# Altium PCB PCB1.PcbDoc
Units mm, origin at the board's own origin, x right, y up, seen from the top; angles counter-clockwise.
Board outline 96.5 x 55.5 mm, 2 copper layers (Top Layer, Bottom Layer), stack 1.671 mm thick; 20 components, 13 nets, 49 pads, 0 vias.
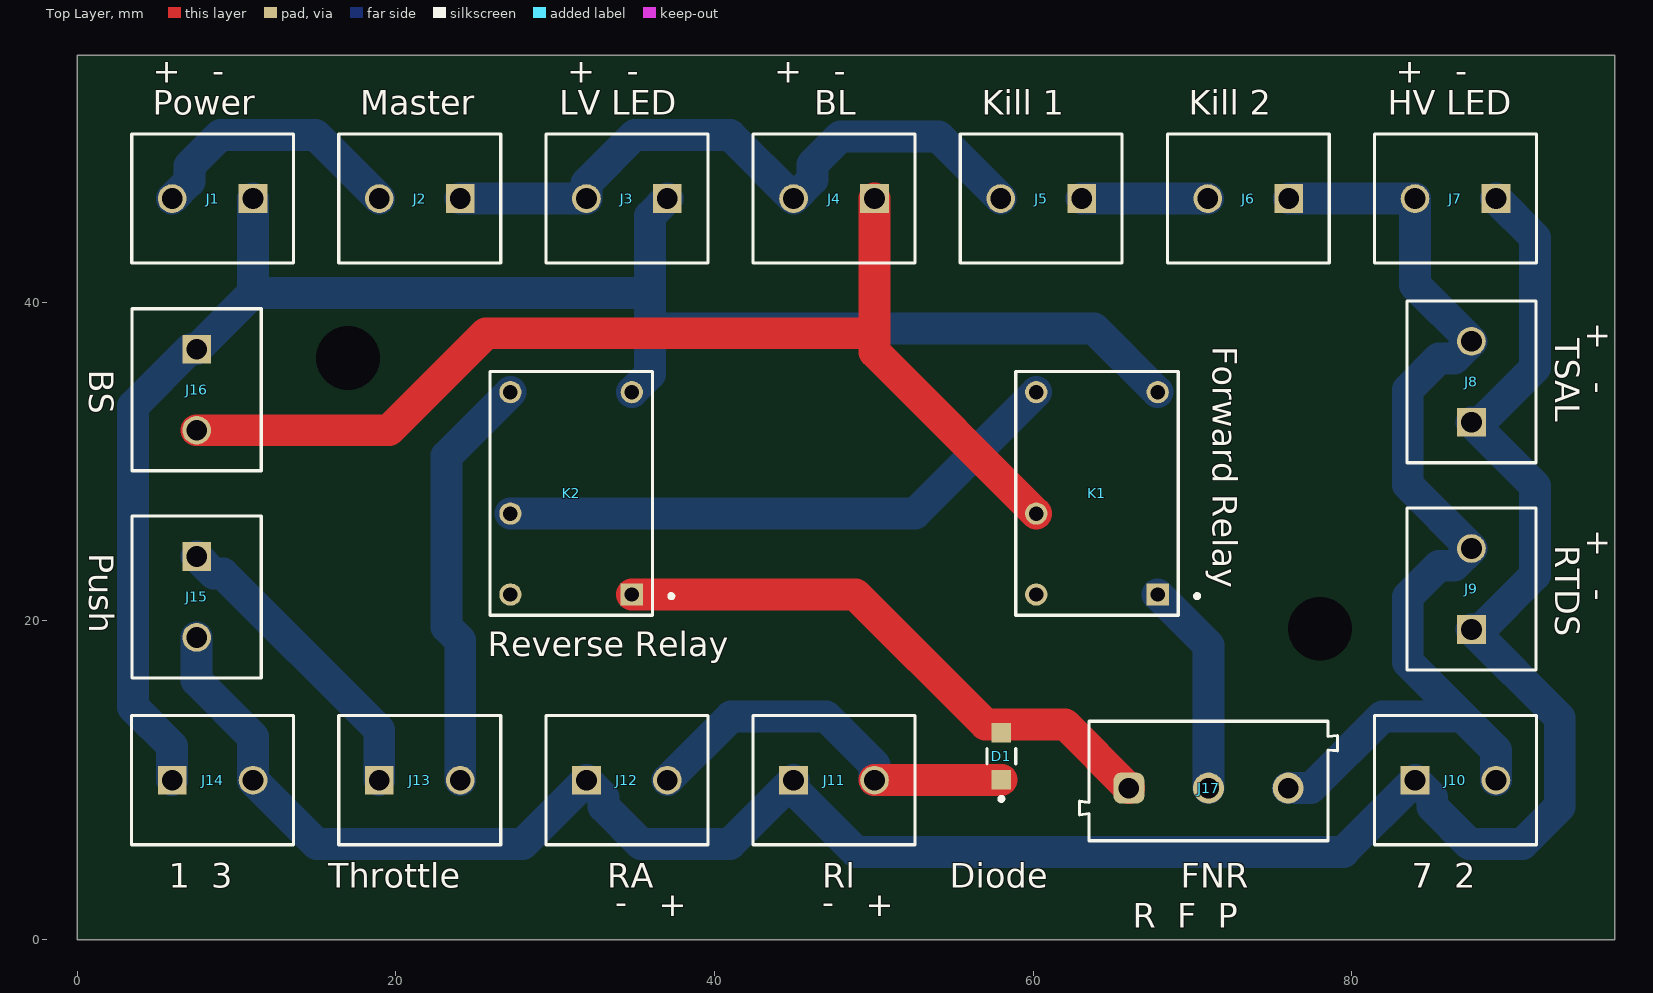
[diagram p0: Top Layer view]
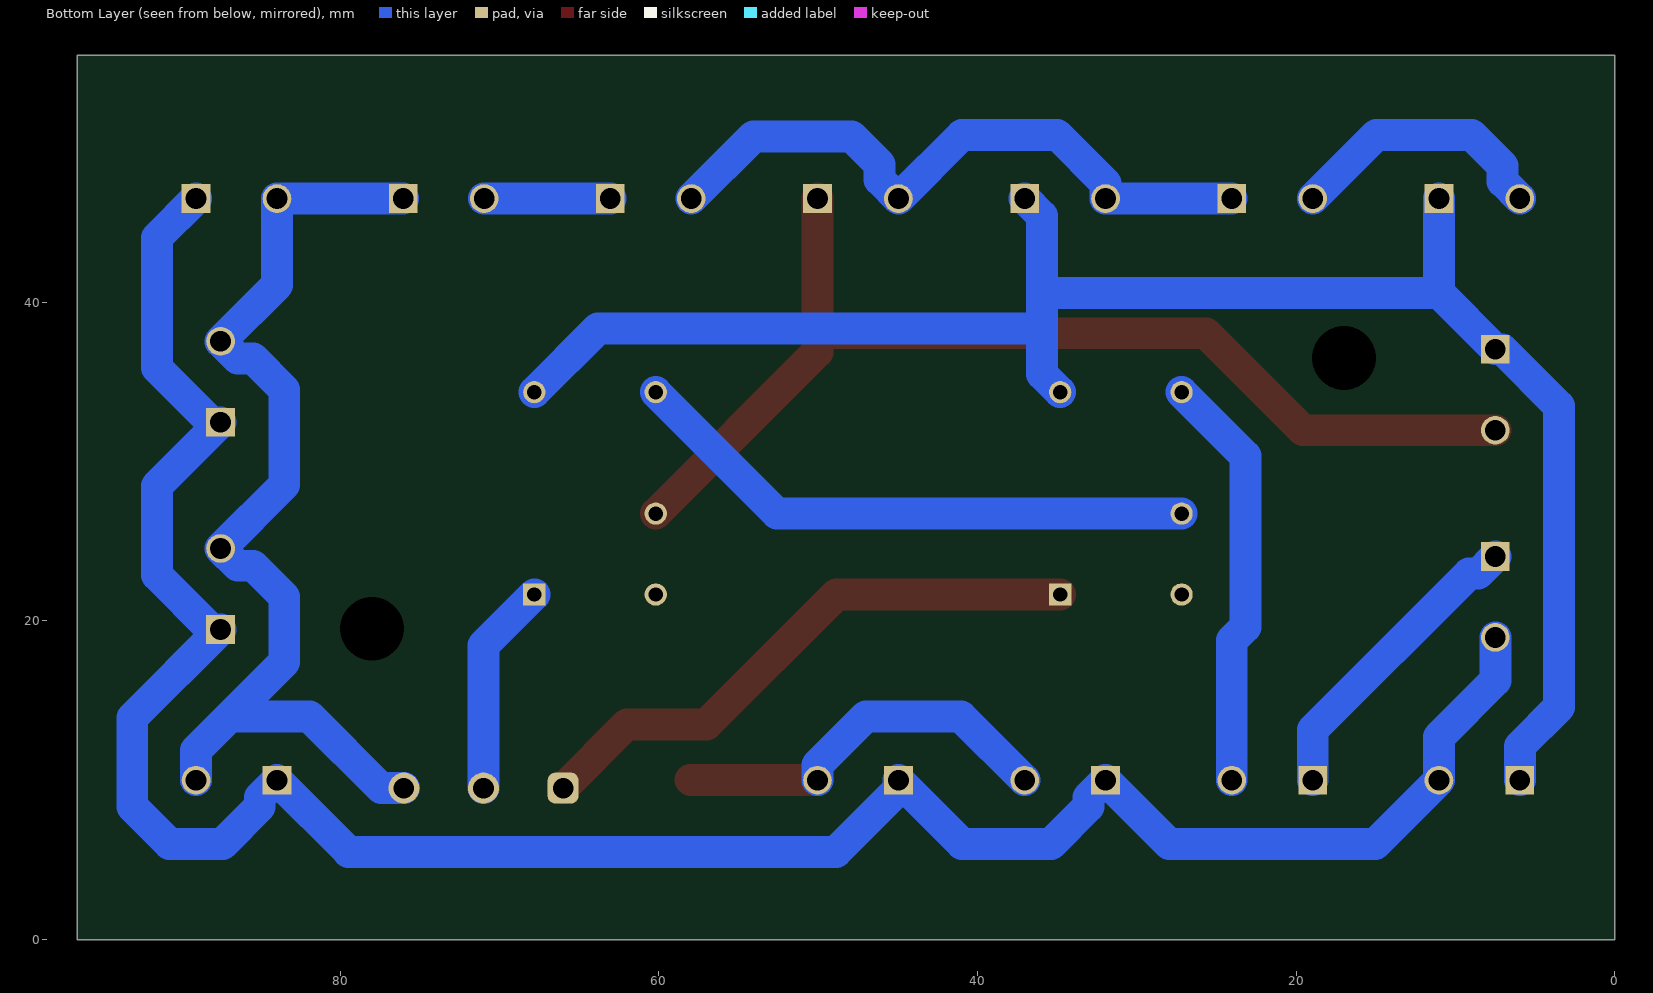
[diagram p1: Bottom Layer view, seen from below]
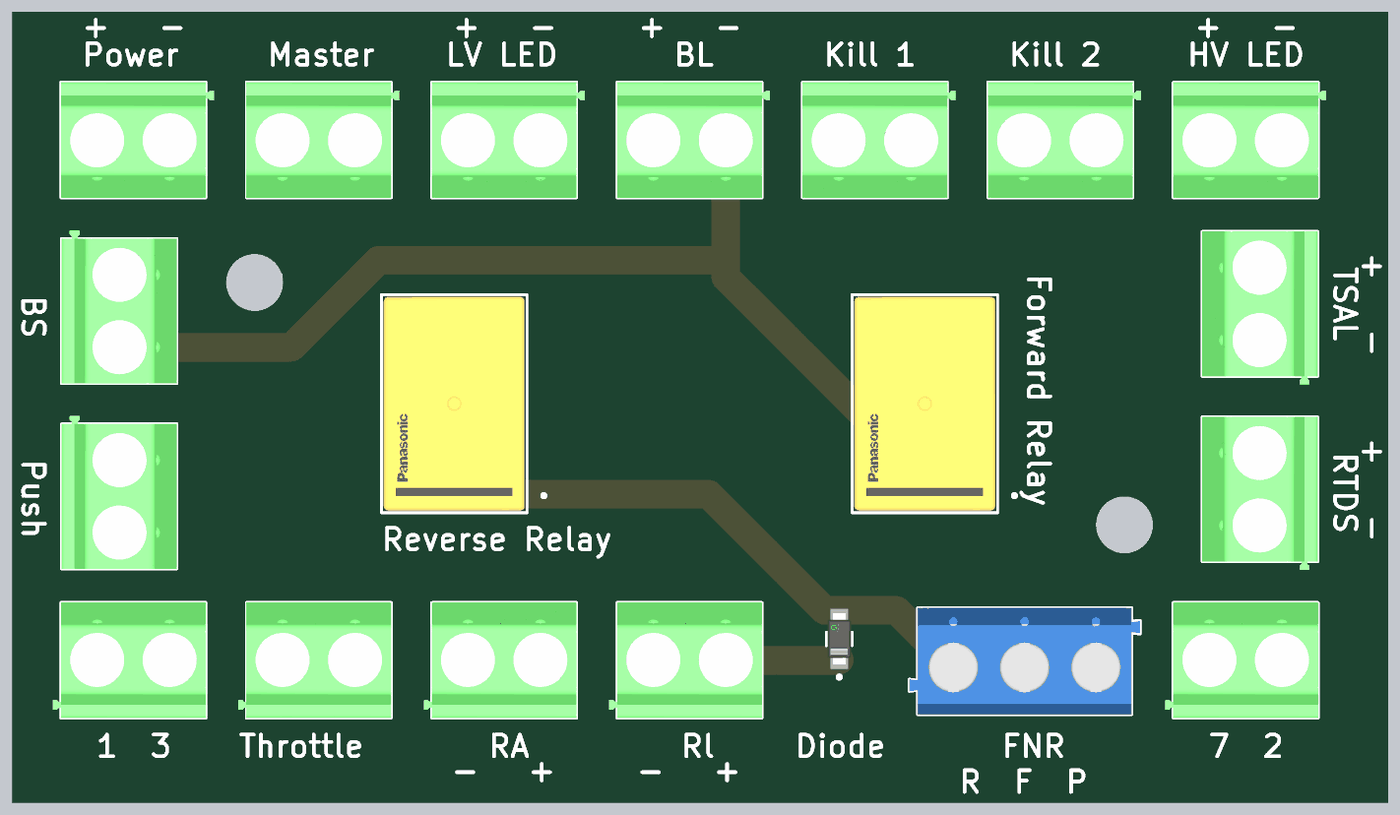
[diagram p2: 3D render of the assembled board from above, using the file's embedded part models]

## Layer stack, top to bottom
Top Solder: solder mask 0.0102, Solder Resist, Dk 3.5
Top Layer: signal copper 0.0356
Dielectric 1: dielectric 1.6, FR-4, Dk 4.8
Bottom Layer: signal copper 0.0356
Bottom Solder: solder mask 0.0102, Solder Resist, Dk 3.5

## Board outline
0,0 96.5,0 96.5,55.5 0,55.5

## Design rules (kind name [scope] priority, off if disabled: settings)
Clearance [All] p1: gap=1 ignorepadtopadclearanceinfootprint=TRUE
HoleSize [All] p1: absolutevalues=TRUE maxlimit=10 minlimit=0.025 maxpercent=80.000 minpercent=20.000
PolygonConnect [All] p1: connectstyle=Relief reliefconductorwidth=0.254 reliefentries=4 polygonreliefangle="90 Angle" airgapwidth=0.254
RoutingVias [All] p1: holewidth=1 width=2 viastyle="Through Hole" minholewidth=1 minwidth=2 maxholewidth=1 maxwidth=2
SolderMaskExpansion [All] p1: expansion=0.102 istentingtop=FALSE
SupplyNets "Schematic Supply Nets_3" [InNet('+12')] p1: voltage=0.000
SupplyNets "Schematic Supply Nets_2" [InNet('GND')] p2: voltage=0.000
Width [All] p1: maxlimit=3 minlimit=1 preferedwidth=2
29 further rules are at their usual default settings.

## Components (designator, comment, footprint, x,y, rotation, side; value= is the part's Value field where it differs from the comment)
D1 "MBR230LSFT1G" FP-498-MFG 58,11.5 r90 top
J1 "1729128" PHOE-1729128-2_V 8.5,46.5 r180 top
J2 "1729128" PHOE-1729128-2_V 21.5,46.5 r180 top
J3 "1729128" PHOE-1729128-2_V 34.5,46.5 r180 top
J4 "1729128" PHOE-1729128-2_V 47.5,46.5 r180 top
J5 "1729128" PHOE-1729128-2_V 60.5,46.5 r180 top
J6 "1729128" PHOE-1729128-2_V 73.5,46.5 r180 top
J7 "1729128" PHOE-1729128-2_V 86.5,46.5 r180 top
J8 "1729128" PHOE-1729128-2_V 87.5,35 r90 top
J9 "1729128" PHOE-1729128-2_V 87.5,22 r90 top
J10 "1729128" PHOE-1729128-2_V 86.5,10 r0 top
J11 "1729128" PHOE-1729128-2_V 47.5,10 r0 top
J12 "1729128" PHOE-1729128-2_V 34.5,10 r0 top
J13 "1729128" PHOE-1729128-2_V 21.5,10 r0 top
J14 "1729128" PHOE-1729128-2_V 8.5,10 r0 top
J15 "1729128" PHOE-1729128-2_V 7.5,21.5 r270 top
J16 "1729128" PHOE-1729128-2_V 7.5,34.5 r270 top
J17 "691102710003" 691102710003 71,9.95 r0 top
K1 "DS1E-S-DC12V" FP-DS1E-S-DC12V-MFG 64,28 r90 top
K2 "DS1E-S-DC12V" FP-DS1E-S-DC12V-MFG 31,28 r90 top

## Footprints (in the part's own frame and the unit in brackets; to place one, negate y for a bottom-side part, rotate by r counter-clockwise, add the part's x,y. Pads: shape width x height; smd on the part's side, far side on the other; paste and mask are expansions set on the pad)
691102710003 [mm] "5,00mm - modular - blue - Horizontal entry with pressure clamp - 9,9 mm height - 03p"
  rrect50% 1.95x1.95 hole 1.3: 1(-5,-0.45)
  round 1.95 hole 1.3: 2(0,-0.45) 3(5,-0.45)
  silkscreen extent -8.1,-3.75 8.1,3.75, body extent -8.1,-3.75 8.1,3.75, height 9.96
FP-498-MFG [mm]
  rect 1.25x1.22 smd paste+0 mask+0: 1(-1.475,0) 2(1.475,0)
  silkscreen extent -2.8,-0.9 0.48,0.9, body extent -2.2,-1 2.2,1, height 0.25
FP-DS1E-S-DC12V-MFG [mm]
  rect 1.4x1.4 hole 0.9 paste-2539.97 mask+0: 1(-6.35,-3.81)
  round 1.4 hole 0.9 paste-2539.97 mask+0: 6(6.35,-3.81) 7(6.35,3.81) 10(-1.27,3.81) 12(-6.35,3.81)
  silkscreen extent -7.65,-6.41 7.65,5.1, body extent -7.75,-5.2 7.75,5.2, height 0.25
PHOE-1729128-2_V [mm] "Receptacle, 2-Leads, Body 8.1x10.16mm, Pitch 5.08mm"
  rect 1.8x1.8 hole 1.3: 1(-2.54,0)
  round 1.8 hole 1.3: 2(2.54,0)
  silkscreen extent -5.08,-4.05 5.08,4.05, body extent -5.65,-4.05 5.08,4.05, height 10.01

## Part data
D1: library part CMP-1055-00442-2, "DIODE SCHOTTKY 30V 2A SOD123L", Average Rectified Current=2A, Case/Package=SOD, Forward Voltage=430mV, Max Forward Surge Current (Ifsm)=40A, Max Operating Temperature=125°C, Max Repetitive Reverse Voltage (Vrrm)=30V, Min Operating Temperature=-55°C, Package Quantity=1, Peak Reverse Current=1mA, Contact Plating=Tin, Element Configuration=Single, Forward Current=2A, Halogen Free="Halogen Free", Height=0.9mm, Lead Free="Lead Free", Length=2.9mm, Max Reverse Voltage (DC)=30V, Number of Pins=2, Packaging="Tape and Reel", Peak Non-Repetitive Surge Current=40A, Radiation Hardening=No, REACH SVHC="No SVHC", Width=1.8mm
J1 J2 J3 J4 J5 J6 J7 J8 J9 J10 J11 J12 J13 J14 J15 J16: library part CMP-2000-05815-1, "PCB Terminal Block, 13.5 A, 400 V, 2-Pin THD, RoHS, Bulk", Current Rating=13500mA, Manufacturer="Phoenix Contact", Package Description="2-Pin Through Hole Device, Body 8.1 x 10.16 mm, Pitch 5.08 mm", Package Reference=1729128-2, Package Version=03/2015, Voltage Rating=400V, Datasheet URL=https://datasheet.ciiva.com/16046/1729128-16046181.pdf, Datasheet Version=12/2013, Manufacturer URL=http://www.phoenixcontact.com/, Mounting Technology=ThroughHole, No. of Positions=2, No. of Rows=1, Orientation=Horizontal, Package URL=https://www.phoenixcontact.com/online/portal/pi/pxc/product_detail_page/!ut/p/b1/3VdJjqNKFDxLH8AFycySyWY2ozFsEPOMMQaDOX1XedGL_1Vdm5YXJleknhSKeBkvI6EA8ncAo3AYoDhBQGco6KN7VURTdemj9us_IEKEZo_YHiPAEWEFmDGOHMORkqKYCORBZxgL7ZoaZYcbFFUZ3fqxSY6GOuxydWUuHqz1ynmMFygu583Bob0Ewr6Sd_l-5m-kAueHiB0jpRwZwe58wwtkpxtMYd_LmGcDRU02dRNEyWt6Y2ti5pSyJ_reIkzIulrqApdnbT11V5jnCKbYNCvhEM1MCpPByat_X379-iThf08CI5GfOPqfBeS3BRoBOdD55AKVv0iLwCMq-2BrzXWSGRH7pUGD9uwXQjiph3xL0DKQwdGa0JImiIOmBNOestqgwTHSSs2oOep-78apyXQBvNi8ZLaFjvjWvcaUEBu0MC6Wbe-d6mB0FAebo2lUWinqYaZs5DAYzV0RP9yitUjnGJ0iI9xhZkT42OCQNUJJhkgWINNQLP2JFP6OpMg3JCVg70jqHT0lvKOnhHf0lPuOnnLf0VPuWx6_dxwUIvwk5WMkT0kLL1mh61l2yZVSzG3pYV_bqo-mj6uMKwKwdnnW8Jh5RTOJzMOA5c-eJDaZQw4mTMPH02PvS_ZAqNVjVTo2WyYLkwH_KU1mmmG5kjRhDqPXLwwVHvVOjCM60-fpXvTDfMGW1PVFVS1r4e4yVDk4ZdNbkUHvqPqQSeian4UD39fNKmachqdJ1NJbyk8rXT9mXTvPk3oE5meulKGgiruPJek-4I9hTT6G8ZLOyRSm2RRVbThERQad5OS28hdt4YW4vG0stgYYzsWsK4_7y6DZMjJSCqri1kyiZR5vD7pwIrNR7QwPHTcLTI5qT7eRlpHrdGiupYlqQDJ7zy_CND8fWWBoLRXxk1RVcXiBQwbTD4Xi7KL-FuO94t9xaqweXzH, Packing=Bulk, PartNumber=1729128, Pitch=5.08mm, RoHS=TRUE
J17: library part CMP-1502-03259-2, Color=Blue, Current=15A, Max Operating Temperature=105°C, Min Operating Temperature=-40°C, Voltage=300V, Contact Material=Brass, Contact Plating=Tin, Current Rating=15A, Height=13.4mm, Housing Material=Nylon, Lead Pitch=5mm, Length=7.5mm, Mount="Through Hole", NexarPartId=8917707, Number of Contacts=3, Number of Levels=1, Number of Pins=3, Number of Positions Per Level=3, Packaging=Box, Pitch=5.0038mm, Plating=Steel, REACH SVHC=Unknown, RoHS=Compliant, Stripping Length=-6mm, Termination=Screw, Voltage Rating=300V, Width=16.2mm, Wire Gauge (Max)=22AWG, Wire Gauge (Min)=14AWG, Wire/Cable Gauge=22AWG
K1 K2: library part CMP-00287-40004987-1, "DS1E-S-DC12V Relay; 2 A AC/DC (Switching), 3 A AC/DC (Carrying); Amber Sealed Type; 1 Form C", Ambient Temperature Range High=70°C, Case/Package=DIP, Coil Current=16.7mA, Coil Power=200mW, Coil Resistance=720Ω, Coil Voltage (DC)=12V, Contact Current Rating=2A, Max Current Rating=3A, Max Voltage Rating (AC)=250V, Max Voltage Rating (DC)=220V, Min Operating Temperature=-40°C, Power Rating=60W, Approvals="CSA, UL", Coil Type=Non-Latching, Contact Material=Silver, Contact Plating="Gold, Silver", Current Rating=2A, Depth=9.9mm, Height=9.9mm, Lead Free="Lead Free", Length=15mm, Max Operating Temperature=70°C, Mount="PCB, Through Hole", NexarPartId=40004987, Number of Contacts=1, Number of Pins=5, Operate Time=10ms, Packaging=Bulk, Power Consumption=200mW, Radiation Hardening=No, REACH SVHC="No SVHC", Relay Type="General Purpose", Release Time=5ms, Rise Time=3ms, RoHS=Compliant, Schedule B="8536490050, 8536490050", Switching Current=2A, Termination="PC Pin", Throw Configuration=SPDT, Voltage Rating (AC)=250V, Voltage Rating (DC)=220V, Weight=3.2g, Width=9.9mm

## Free pads (board coordinates)
  round 1.524 hole 4 unplated: "mount hole 1"(17,36.5) "mount hole 2"(78,19.5)

## Nets (pads, with @x,y where several pads share a name; then routed paths per layer and width w, separated by ;. In a path a pad name is that pad's centre, name@x,y a point inside that pad or via, vN(x,y) a via of type N, cw(c..) or ccw(c..) an arc to the next point about the centre after c; other vN are vias at no path point)
+12: J1.2 J2.2 | length 16.9
  Bottom Layer w2: J1.2 7.04,47.58 7.04,48.543 8.997,50.5 14.96,50.5 J2.2
GND: J1.1 J3.1 J14.1 J16.1 K1.6 K2.6 | length 112.6
  Bottom Layer w2: J14.1 5.96,12.133 3.5,14.593 3.5,33.475 7.065,37.04 J16.1 11.04,40.58 ; J1.1 11.04,40.58 ; K2.6 35.96,35.5 35.96,38 ; J3.1 35.96,45.42 35.96,40.5 ; K1.6 63.81,38.35 36.31,38.35 35.96,38 ; 11.04,40.58 35.88,40.58 35.96,40.5 ; 35.96,38 35.96,40.5
NetD1_1: D1.1 J11.2 J12.2 | length 24.8
  Top Layer w2: J11.2 57.975,10 D1.1
  Bottom Layer w2: J12.2 41.04,14 47.003,14 50.04,10.963 J11.2
NetD1_2: D1.2 J17.1 K2.1 | length 36.2
  Top Layer w2: K2.1 48.85,21.65 57,13.5 62,13.5 J17.1
NetJ2_1: J2.1 J3.2 J4.2 J5.2 | length 41.6
  Bottom Layer w2: J2.1 J3.2 31.96,47.463 34.997,50.5 40.96,50.5 J4.2 46.14,47.68 46.14,48.643 47.897,50.4 54.06,50.4 J5.2
NetJ4_1: J4.1 J16.2 K1.10 | length 69.1
  Top Layer w2: J16.2 19.567,31.96 25.657,38.05 49.99,38.05 50.04,38 ; J4.1 50.04,38 ; K1.10 50.04,36.88 50.04,38
NetJ5_1: J5.1 J6.2 | length 7.9
  Bottom Layer w2: J5.1 J6.2
NetJ6_1: J6.1 J7.2 J8.2 J9.2 J10.2 J17.3 | length 67.1
  Bottom Layer w2: J17.3 77.417,9.5 81.917,14 86.917,14 ; J6.1 J7.2 83.96,41.08 J8.2 86.42,36.46 85.457,36.46 83.5,34.503 83.5,28.54 J9.2 86.42,23.46 85.457,23.46 83.5,21.503 83.5,17.417 86.917,14 ; J10.2 89.04,11.877 86.917,14
NetJ7_1: J7.1 J8.1 J9.1 J10.1 J11.1 J12.1 J14.2 J15.2 | length 153.5
  Bottom Layer w2: J15.2 7.5,16.25 11.04,12.71 J14.2 15.04,6 27.96,6 J12.1 33.04,8.92 33.04,8.343 35.383,6 40.96,6 J11.1 44.96,9.423 48.883,5.5 79.46,5.5 J10.1 85.04,8.92 85.04,8.343 87.383,6 90.697,6 93.04,8.343 93.04,13.92 J9.1 88.077,19.46 91.5,22.883 91.5,28.46 J8.1 88.077,32.46 91.5,35.883 91.5,44.04 J7.1
NetJ13_1: J13.1 J15.1 | length 19.1
  Bottom Layer w2: J15.1 8.58,22.96 9.157,22.96 18.96,13.157 J13.1
NetJ13_2: J13.2 K2.7 | length 26.4
  Bottom Layer w2: J13.2 24.04,18.768 23.19,19.618 23.19,30.35 K2.7
NetJ17_2: J17.2 K1.1 | length 13.5
  Bottom Layer w2: K1.1 71,18.46 J17.2
NetK1_7: K1.7 K2.10 | length 36.2
  Bottom Layer w2: K2.10 52.57,26.73 K1.7
pads on no net: K1.12 K2.12

## Silkscreen, mask and mechanical layers (free items; w line width, h text height)
Top Overlay:
  text "+   -" at 4.754,53.754 h1.52
  text "+   -" at 30.754,53.754 h1.52
  text "+   -" at 43.754,53.754 h1.52
  text "+   -" at 82.754,53.754 h1.52
  text "Power" at 4.754,51.754 h1.52
  text "Master" at 17.754,51.754 h1.52
  text "LV LED" at 30.254,51.754 h1.52
  text "BL" at 46.254,51.754 h1.52
  text "Kill 1" at 56.754,51.754 h1.52
  text "Kill 2" at 69.754,51.754 h1.52
  text "HV LED" at 82.254,51.754 h1.52
  text "+   -" at 94.754,38.746 h1.52 r270
  text "TSAL" at 92.754,37.746 h1.52 r270
  text "Forward Relay" at 71.262,37.246 h1.52 r270
  text "BS" at 0.754,35.746 h1.52 r270
  text "+   -" at 94.754,25.746 h1.52 r270
  text "RTDS" at 92.754,24.746 h1.52 r270
  text "Push" at 0.754,24.246 h1.52 r270
  text "Reverse Relay" at 25.754,17.762 h1.52
  text "1  3" at 5.754,3.254 h1.52
  text "Throttle" at 15.754,3.254 h1.52
  text "RA" at 33.254,3.254 h1.52
  text "Rl" at 46.754,3.254 h1.52
  text "Diode" at 54.754,3.254 h1.52
  text "FNR" at 69.254,3.254 h1.52
  text "7  2" at 83.754,3.254 h1.52
  text "+   -" at 38.246,2.746 h1.52 r180
  text "+   -" at 51.246,2.746 h1.52 r180
  text "R  F  P" at 66.254,0.754 h1.52